# Altium PCB LED.PcbDoc
Units mm, origin at the board's own origin, x right, y up, seen from the top; angles counter-clockwise.
Board outline 20 x 20 mm, 2 copper layers (Top Layer, Bottom Layer), stack 1.671 mm thick; 5 components, 4 nets, 10 pads, 1 vias.
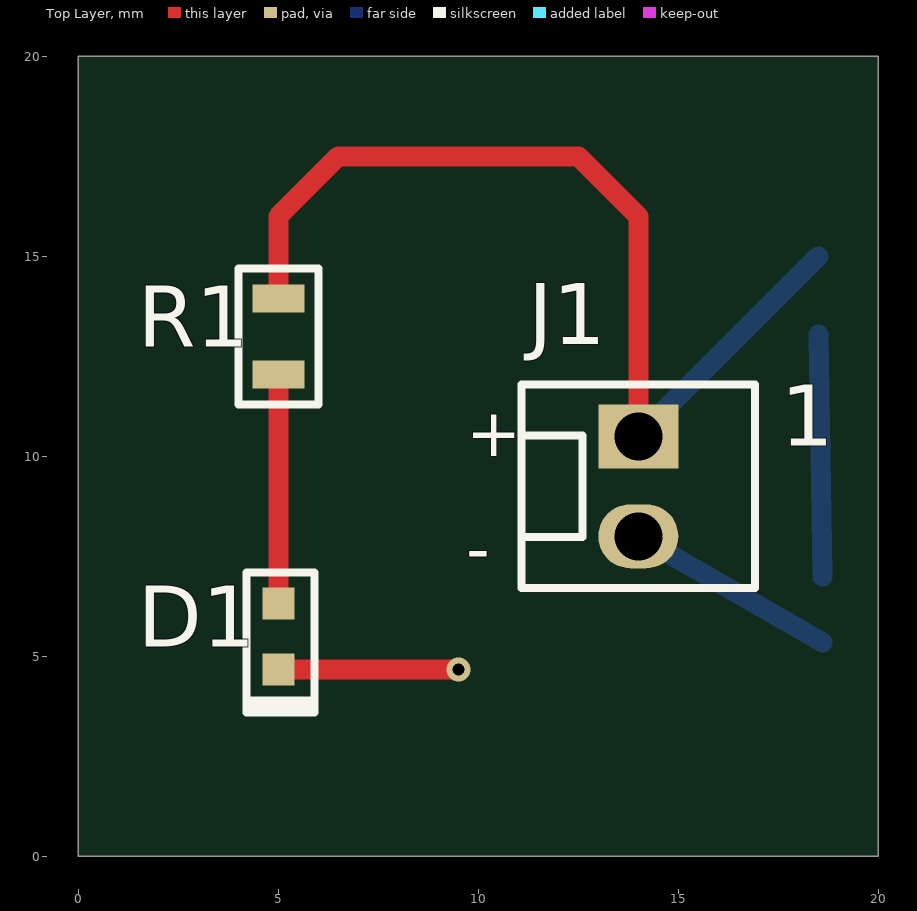
[diagram p0: Top Layer view]
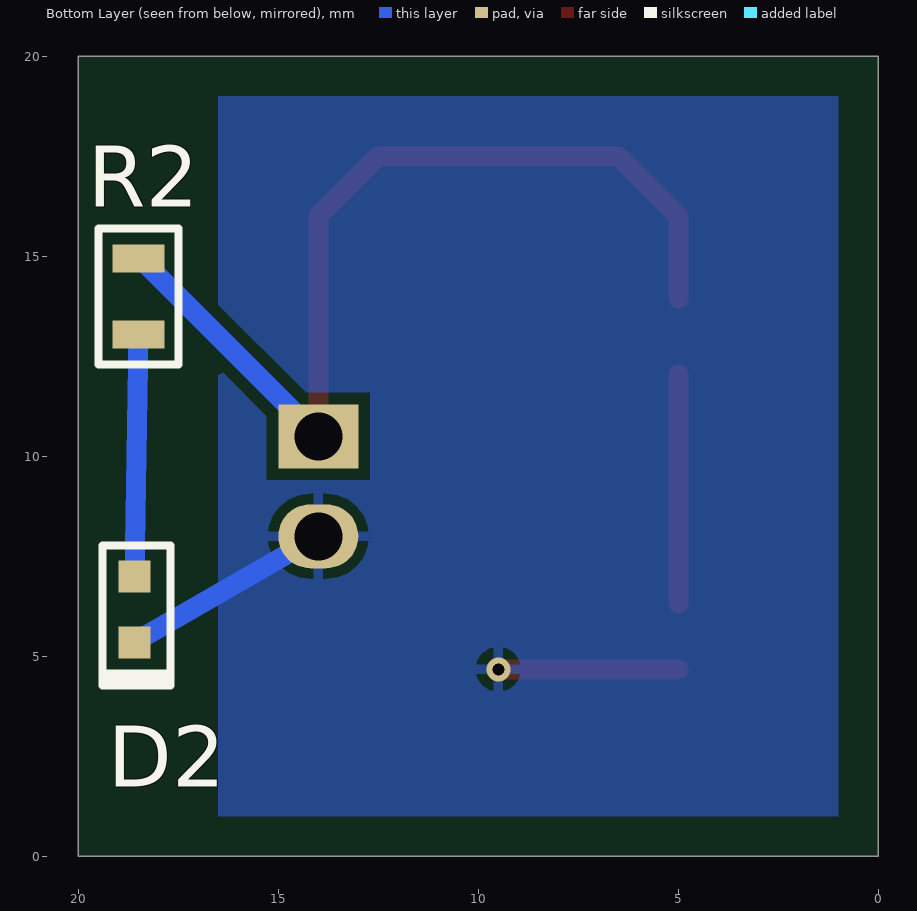
[diagram p1: Bottom Layer view, seen from below]
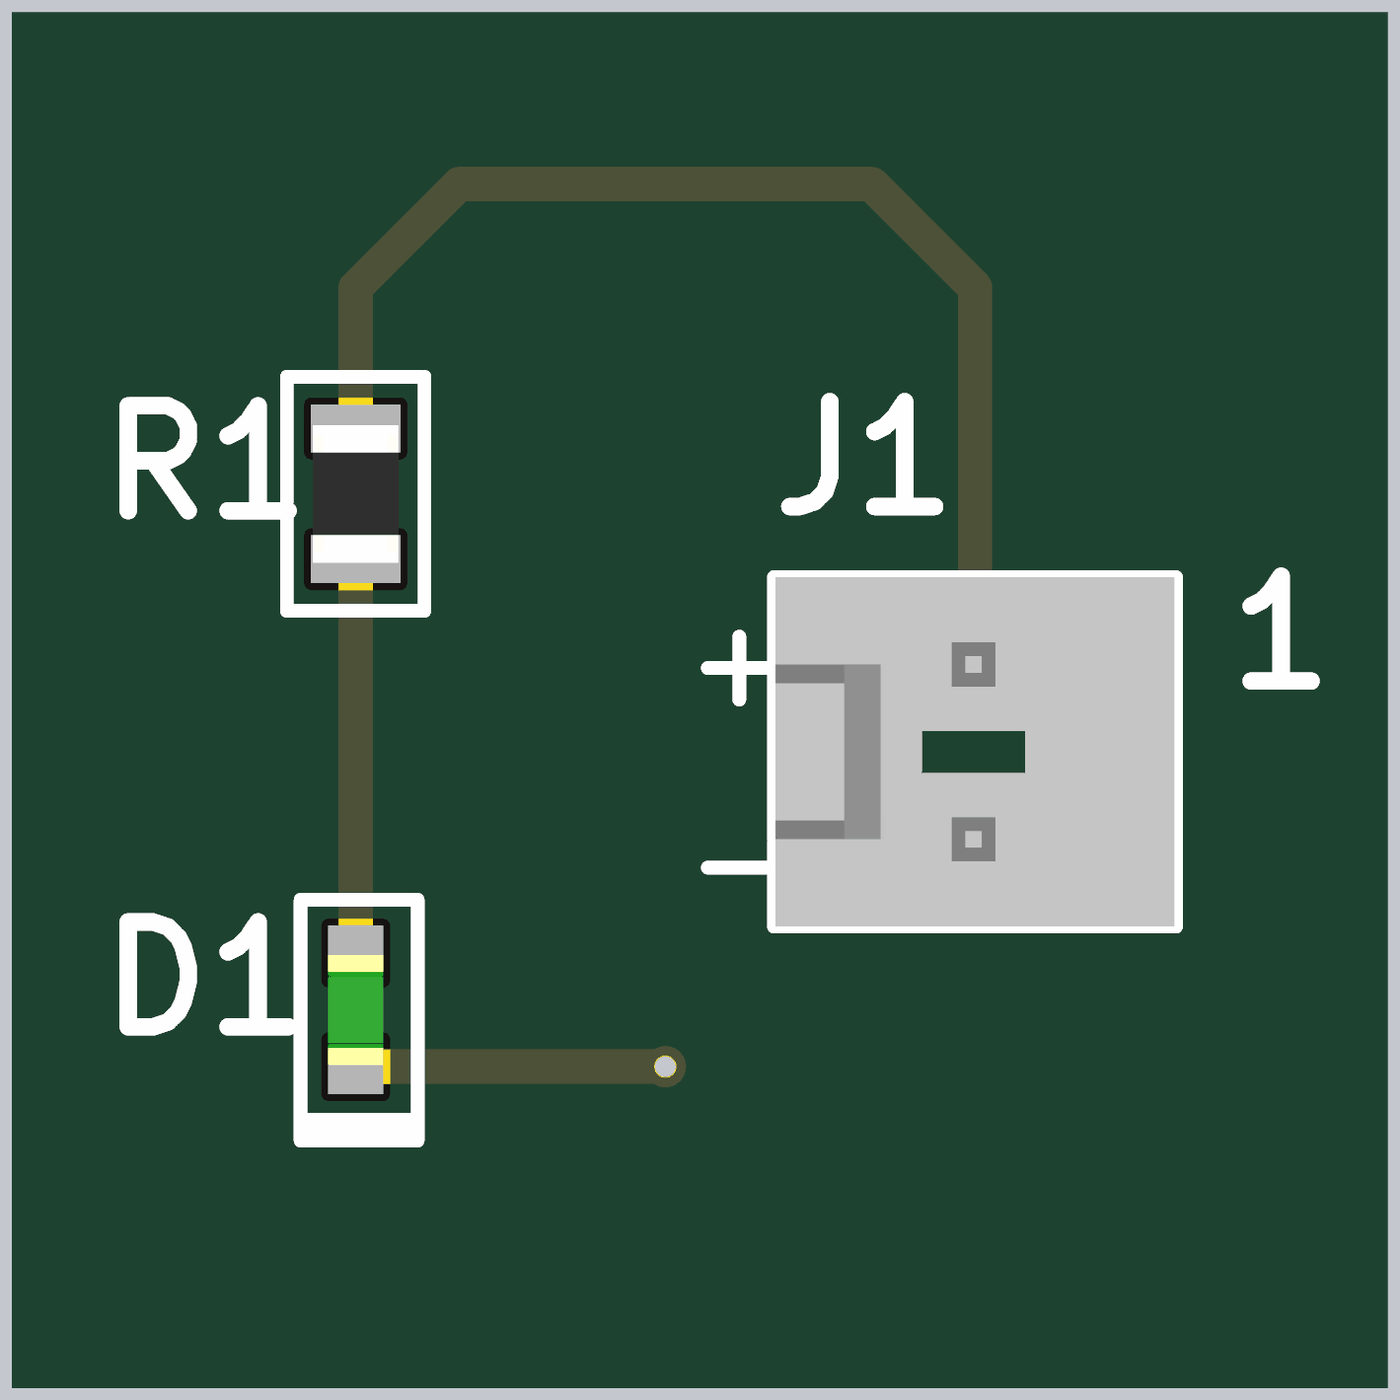
[diagram p2: 3D render of the assembled board from above, using the file's embedded part models]

## Layer stack, top to bottom
Top Solder: solder mask 0.0102, Solder Resist, Dk 3.5
Top Layer: signal copper 0.0356
Dielectric 1: dielectric 1.6, FR-4, Dk 4.8
Bottom Layer: signal copper 0.0356
Bottom Solder: solder mask 0.0102, Solder Resist, Dk 3.5

## Board outline
0,0 20,0 20,20 0,20

## Design rules (kind name [scope] priority, off if disabled: settings)
Clearance [All] p1: gap=0.3 ignorepadtopadclearanceinfootprint=FALSE
PolygonConnect [All] p1: connectstyle=Relief reliefconductorwidth=0.254 reliefentries=4 polygonreliefangle="90 Angle" airgapwidth=0.254
RoutingVias [All] p1: holewidth=0.3 width=0.6 viastyle="Through Hole" minholewidth=0.3 minwidth=0.6 maxholewidth=0.3 maxwidth=0.6
SilkToSolderMaskClearance [IsPad] p1: minsilkscreentomaskgap=0.1 clearancetoexposedcopper=TRUE
SolderMaskExpansion [All] p1: expansion=0.102 istentingtop=FALSE
Width [All] p1: maxlimit=1 minlimit=0.3 preferedwidth=0.5
29 further rules are at their usual default settings.

## Components (designator, comment, footprint, x,y, rotation, side; value= is the part's Value field where it differs from the comment)
D1 "RED" LED0803RED 5,5.5 r90 top
D2 "RED" LED0803RED 18.6,6.175 r90 bottom
J1 "1x2 Header" HDR1X2 14,10.5 r0 top
R1 "360R" R0805 5,13 r270 top
R2 "360R" R0805 18.5,14 r270 bottom

## Footprints (in the part's own frame and the unit in brackets; to place one, negate y for a bottom-side part, rotate by r counter-clockwise, add the part's x,y. Pads: shape width x height; smd on the part's side, far side on the other; paste and mask are expansions set on the pad)
HDR1X2 [mm]
  rect 2x1.6 hole 1.2: 1(0,0)
  oval 2x1.6 hole 1.2: 2(0,-2.5)
  silkscreen extent -2.92,-3.79 2.92,1.29, body extent -2.9,-3.79 2.9,1.29, height 11.71
LED0803RED [mm]
  rect 0.8x0.8 smd: 1(-0.825,0) 2(0.825,0)
  silkscreen extent -1.9,-0.9 1.6,0.8, body extent -0.8,-0.4 0.8,0.4, height 0.4
R0805 [mm]
  rect 0.7x1.3 smd: 1(-0.95,0) 2(0.95,0)
  silkscreen extent -1.7,-1 1.7,1, body extent -1,-0.62 1,0.63, height 0.61

## Part data
D1 D2: library part LSL29K-G1J2-1-Z, "LED Uni-Color Red 643nm Automotive 2-Pin SMD T/R", Case Code (Imperial)=0603, Case Code (Metric)=1608, Color=Red, Forward Current=20mA, Forward Voltage=1.8V, Lens Color=White, Manufacturer="Osram Opto", Max Operating Temperature=100°C, Min Operating Temperature=-40°C, Package Quantity=5000, Reverse Voltage=12V, Supplier Part Number 1=475-2506-1-ND, Test Current=2mA, Case/Package=0603, Category=Optoelectronics, ComponentLink1Description=https://datasheet.ciiva.com/2112/00077099-0-2112844.pdf?src-supplier=Digi-Key, ComponentLink1URL=https://datasheet.ciiva.com/2112/00077099-0-2112844.pdf?src-supplier=Digi-Key, ComponentLink2Description=https://datasheet.ciiva.com/2112/00077099-0-2112845.pdf?src-supplier=Digi-Key, ComponentLink2URL=https://datasheet.ciiva.com/2112/00077099-0-2112845.pdf?src-supplier=Digi-Key, ComponentLink3Description=https://datasheet.ciiva.com/2112/00077099-0-2112846.pdf?src-supplier=Digi-Key, ComponentLink3URL=https://datasheet.ciiva.com/2112/00077099-0-2112846.pdf?src-supplier=Digi-Key, Contact Plating=Tin,Matte, Dominant Wavelength=630nm, Height=0.65mm, Illumination Color=Red, Length=1.7mm, Lens Size=0.8mm, Lens Style=Flat,Diffused,Colorless,Rectangular, Lens Transparency=Diffused, Luminous Flux=0.017lm, Luminous Intensity=4.5mcd, Manufacturer Part Number=LSL29K-G1J2-1-Z, Mount="Surface Mount", Number of LEDs=1, Number of Pins=2, Packaging="Tape and Reel", Pricing 1="1=0.38000, 10=0.25000, 100=0.16700, 500=0.11552, 1000=0.09627, 2000=0.08664 (USD)", RoHS=Yes, Stock 1=32781, Supplier 1=Digi-Key, Viewing Angle=160°, Width=0.8mm
J1: library part 022292021, Manufacturer=Molex, Supplier Part Number 1=WM2744-ND, Category=Connectors, Manufacturer Part Number=022292021, Number of Circuits=2, Orientation=Vertical, Pricing 1="1=0.48000, 10=0.38700, 100=0.28400, 1000=0.22593, 5000=0.19365, 10000=0.18074 (USD)", RoHS=No, Stock 1=19377, Supplier 1=Digi-Key
R1 R2: library part CRCW080536R0FKEA, "RES, THICK FILM, 36R, 1%, 0.125W, 0805; Product Range:AEC-Q200 CRCW Series; Resistance:36ohm; Power Rating:125mW; Resistance Tolerance: 1%; Voltage Rating:150V; Resistor Case Style:0805 [2012 Metric]; Packaging:Cut Tape ;RoHS Compliant: Yes", Case Code (Imperial)=0805, Case Code (Metric)=2012, Manufacturer=Vishay, Max Operating Temperature=155°C, Max Power Dissipation=125mW, Min Operating Temperature=-55°C, Package Quantity=5000, Resistance=36R, Resistor Type="Thick Film", Supplier Part Number 1=541-36.0CCT-ND, Temperature Coefficient=100ppm/°C, Tolerance=1%, Voltage Rating=150V, Case/Package=0805, Category=Resistors, ComponentLink1Description=https://datasheet.ciiva.com/5936/1697337-5936166.pdf?src-supplier=Farnell, ComponentLink1URL=https://datasheet.ciiva.com/5936/1697337-5936166.pdf?src-supplier=Farnell, ComponentLink2Description=https://datasheet.ciiva.com/2467/dcrcwe3-2467497.pdf?src-supplier=Digi-Key, ComponentLink2URL=https://datasheet.ciiva.com/2467/dcrcwe3-2467497.pdf?src-supplier=Digi-Key, ComponentLink3Description=https://datasheet.ciiva.com/22674/1912744-22674873.pdf?src-supplier=Element14, ComponentLink3URL=https://datasheet.ciiva.com/22674/1912744-22674873.pdf?src-supplier=Element14, ComponentLink4Description=https://datasheet.ciiva.com/2467/dcrcwe3-2467498.pdf?src-supplier=Digi-Key, ComponentLink4URL=https://datasheet.ciiva.com/2467/dcrcwe3-2467498.pdf?src-supplier=Digi-Key, ComponentLink5Description=https://datasheet.ciiva.com/22705/1697337-22705578.pdf?src-supplier=Element14, ComponentLink5URL=https://datasheet.ciiva.com/22705/1697337-22705578.pdf?src-supplier=Element14, ComponentLink6Description=https://datasheet.ciiva.com/2467/dcrcwe3-2467499.pdf?src-supplier=Digi-Key, ComponentLink6URL=https://datasheet.ciiva.com/2467/dcrcwe3-2467499.pdf?src-supplier=Digi-Key, ComponentLink7Description=https://datasheet.ciiva.com/9013/dcrcwe3-9013853.pdf?src-supplier=Avnet, ComponentLink7URL=https://datasheet.ciiva.com/9013/dcrcwe3-9013853.pdf?src-supplier=Avnet, ComponentLink8Description=https://datasheet.ciiva.com/5550/dcrcwe3-109170-5550495.pdf?src-supplier=Mouser, ComponentLink8URL=https://datasheet.ciiva.com/5550/dcrcwe3-109170-5550495.pdf?src-supplier=Mouser, ComponentLink9Description=https://datasheet.ciiva.com/26316/fld-crcw-e3-data-en-26316527.pdf?src-supplier=Distrelec, ComponentLink9URL=https://datasheet.ciiva.com/26316/fld-crcw-e3-data-en-26316527.pdf?src-supplier=Distrelec, Contact Plating=Tin, Depth=1.25mm, Features="Automotive AEC-Q200", Height=0.45mm, Lead Free="Lead Free", Length=2mm, Manufacturer Part Number=CRCW080536R0FKEA, Military Standard=Not, Number of Pins=2, Number of Terminations=2, Packaging="Cut Tape", Power Rating=125mW, Pricing 1="1=0.10000, 10=0.06300, 100=0.02540, 1000=0.01143, 2500=0.00992 (USD)", REACH SVHC=Unknown, RoHS=Yes, RoHS Compliant=Yes, Series="D/CRCW E3", Stock 1=28487, Supplier 1=Digi-Key, Technology="THICK FILM", Termination=SMD/SMT, Voltage Rating (DC)=150V, Weight=0.000194oz, Width=1.25mm

## Via types
v1: diameter 0.6, hole 0.3, Top Layer to Bottom Layer, tented both sides, 1 vias

## Nets (pads, with @x,y where several pads share a name; then routed paths per layer and width w, separated by ;. In a path a pad name is that pad's centre, name@x,y a point inside that pad or via, vN(x,y) a via of type N, cw(c..) or ccw(c..) an arc to the next point about the centre after c; other vN are vias at no path point)
+3V3: J1.1 R1.1 R2.1 | length 24.2
  Top Layer w0.5: R1.1 5,16 6.5,17.5 12.5,17.5 14,16 J1.1
  Bottom Layer w0.5: J1.1 R2.1@18.5,15
DIODE1: D1.2 R1.2 | length 5.7
  Top Layer w0.5: D1.2 R1.2
DIODE2: D2.2 R2.2 | length 6.1
  Bottom Layer w0.5: R2.2 D2.2
GND: D1.1 D2.1 J1.2 | length 9.8
  Top Layer w0.5: D1.1 v1(9.5,4.675)
  Bottom Layer w0.5: J1.2 D2.1

## Polygon pours and split planes (outlines as drawn)
GND on Bottom Layer "GND_L02_P000" (solid, pour order 0): 1,1 16.5,1 16.5,19 1,19

## Silkscreen, mask and mechanical layers (free items; w line width, h text height)
Top Overlay:
  text "+" at 9.7,10 h1.2
  text "-" at 9.7,7.1 h1.2
Board Outline:
  the board outline again, w0.1

## Text inside footprints (layer, text, board x,y; h text height)
J1: Top Overlay "1" at 17.556,10.266 h1.52